# Altium PCB Bluetooth_antenna.PcbDoc
Units mm, origin at the board's own origin, x right, y up, seen from the top; angles counter-clockwise.
Board outline 48 x 29.6 mm, 2 copper layers (Top Layer, Bottom Layer); 2 components, 2 nets, 2 pads, 0 vias.
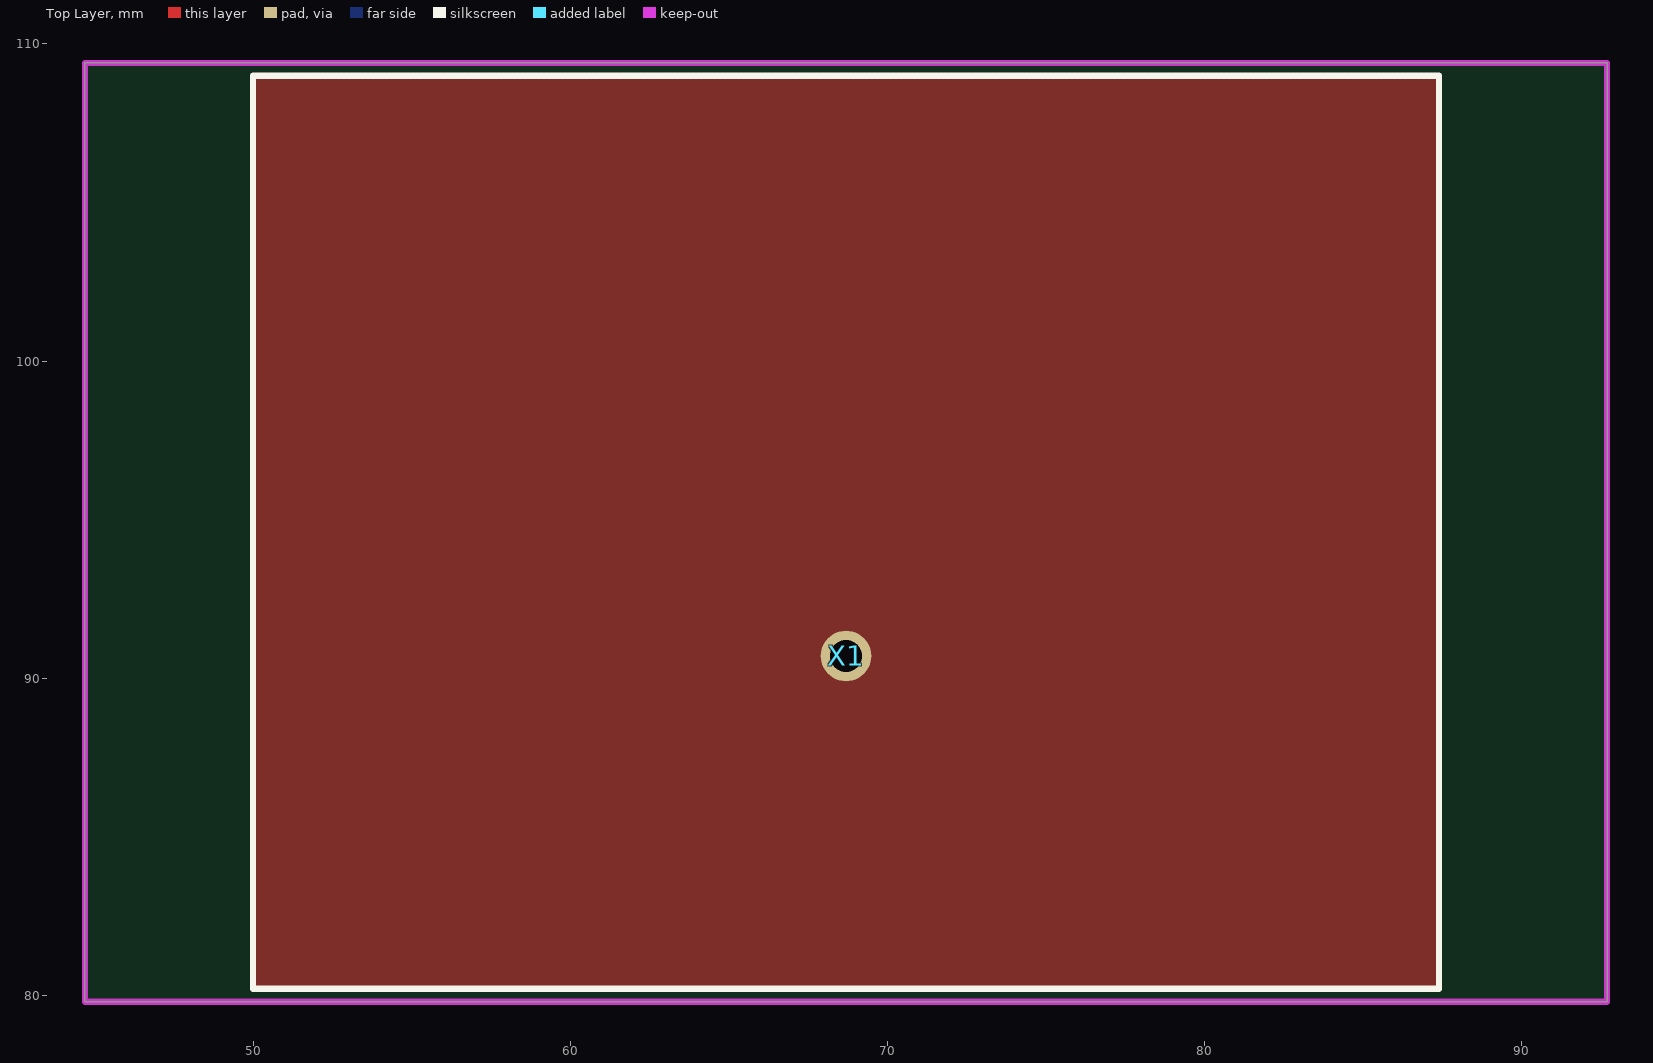
[diagram p0: Top Layer view]
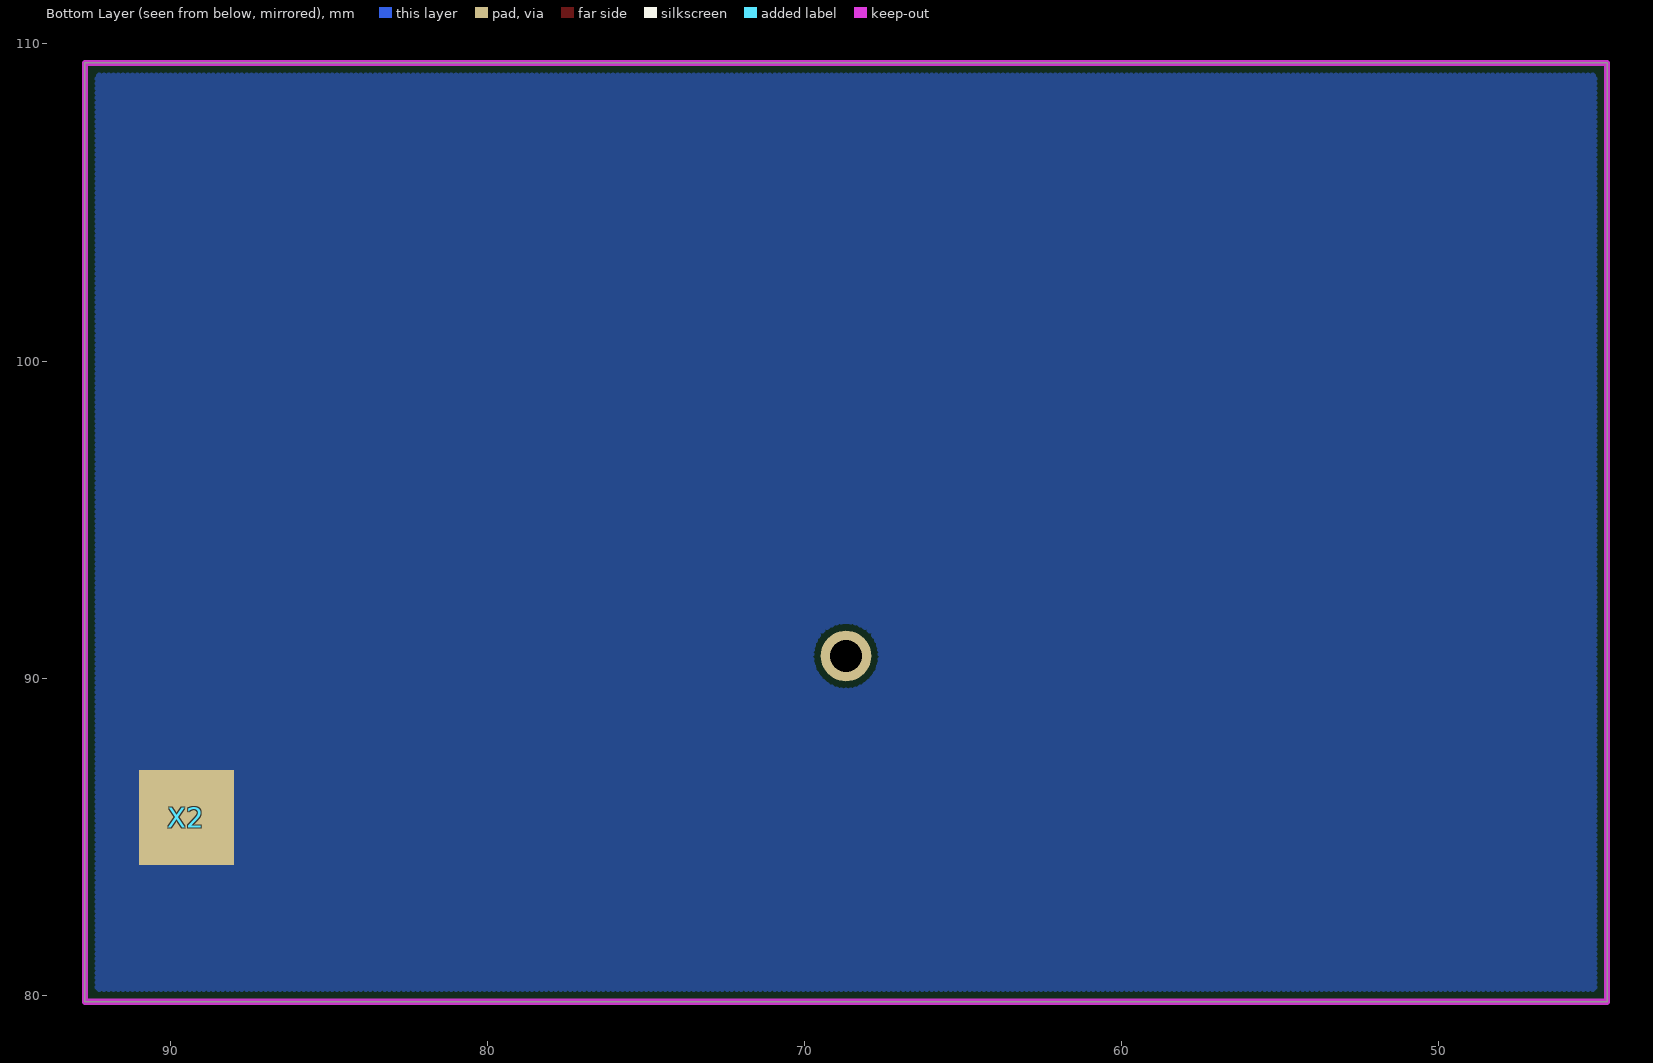
[diagram p1: Bottom Layer view, seen from below]

## Layer stack, top to bottom
Top Solder: solder mask 0.0102, Solder Resist, Dk 3.5
Top Layer: signal copper 0.0356
Dielectric 1: dielectric 0.32, FR-4, Dk 4.8
Bottom Layer: signal copper 0.0356
Bottom Solder: solder mask 0.0102, Solder Resist, Dk 3.5

## Board outline
44.7,79.8 92.7,79.8 92.7,109.4 44.7,109.4

## Design rules (kind name [scope] priority, off if disabled: settings)
Clearance [All] p1: gap=0.2
PolygonConnect [All] p1: connectstyle=Direct reliefconductorwidth=0.254 reliefentries=4 polygonreliefangle="90 Angle" airgapwidth=0.254
RoutingVias [All] p1: holewidth=0.711 width=1.27 viastyle="Through Hole" minholewidth=0.711 minwidth=1.27 maxholewidth=0.711 maxwidth=1.27
SolderMaskExpansion [All] p1: expansion=0.102
Width [All] p1: maxlimit=3 minlimit=0.2 preferedwidth=0.5
30 further rules are at their usual default settings.

## Components (designator, comment, footprint, x,y, rotation, side; value= is the part's Value field where it differs from the comment)
X1 "PIN_1mm" PIN_1mm 68.7,90.7 r0 top
X2 "PIN_3x3mm_SMD" PIN_3x3mm_SMD 89.5,85.6 r180 bottom

## Footprints (in the part's own frame and the unit in brackets; to place one, negate y for a bottom-side part, rotate by r counter-clockwise, add the part's x,y. Pads: shape width x height; smd on the part's side, far side on the other; paste and mask are expansions set on the pad)
PIN_1mm [mm]
  round 1.6 hole 1: 1(0,0)
PIN_3x3mm_SMD [mm]
  rect 3x3 smd mask-5: 1(0,0)

## Nets (pads, with @x,y where several pads share a name; then routed paths per layer and width w, separated by ;. In a path a pad name is that pad's centre, name@x,y a point inside that pad or via, vN(x,y) a via of type N, cw(c..) or ccw(c..) an arc to the next point about the centre after c; other vN are vias at no path point)
FEED: X1.1
GND: X2.1

## Polygon pours and split planes (outlines as drawn)
FEED on Top Layer "FEED_L01_P000" (hatched 90Degree grid 0.15 track 0.2, remove dead copper, pour order 0): 50,109 87.4,109 87.4,80.2 50,80.2
GND on Bottom Layer "GND_L02_P002" (hatched 90Degree grid 0.15 track 0.2, remove dead copper, pour order 2): 44.7,109.4 92.7,109.4 92.7,79.8 44.7,79.8

## Keep-outs
Keep-Out Layer:
  the board outline again, w0.2

## Silkscreen, mask and mechanical layers (free items; w line width, h text height)
Top Overlay:
  lines w0.2: 50,80.2 50,109 87.4,109 87.4,80.2 50,80.2
Bottom Solder:
  rectangle: 45,80.5 46.2,81.7
  rectangle: 45,83.5 46.2,84.7
  rectangle: 45,86.5 46.2,87.7
  rectangle: 45,89.5 46.2,90.7
  rectangle: 45,92.5 46.2,93.7
  rectangle: 45,95.5 46.2,96.7
  rectangle: 45,98.5 46.2,99.7
  rectangle: 45,101.5 46.2,102.7
  rectangle: 45,104.5 46.2,105.7
  rectangle: 45,107.5 46.2,108.7
  rectangle: 91.2,80.5 92.4,81.7
  rectangle: 91.2,83.5 92.4,84.7
  rectangle: 91.2,86.5 92.4,87.7
  rectangle: 91.2,89.5 92.4,90.7
  rectangle: 91.2,92.5 92.4,93.7
  rectangle: 91.2,95.5 92.4,96.7
  rectangle: 91.2,98.5 92.4,99.7
  rectangle: 91.2,101.5 92.4,102.7
  rectangle: 91.2,104.5 92.4,105.7
  rectangle: 91.2,107.5 92.4,108.7